# Altium PCB var_2 (1).PcbDoc
Units mil, origin at the board's own origin, x right, y up, seen from the top; angles counter-clockwise.
Board outline 3185.57 x 3152.48 mil, 2 copper layers (Top Layer, Top, Bottom Layer, Bottom); 14 components, 15 nets, 54 pads, 1 vias.
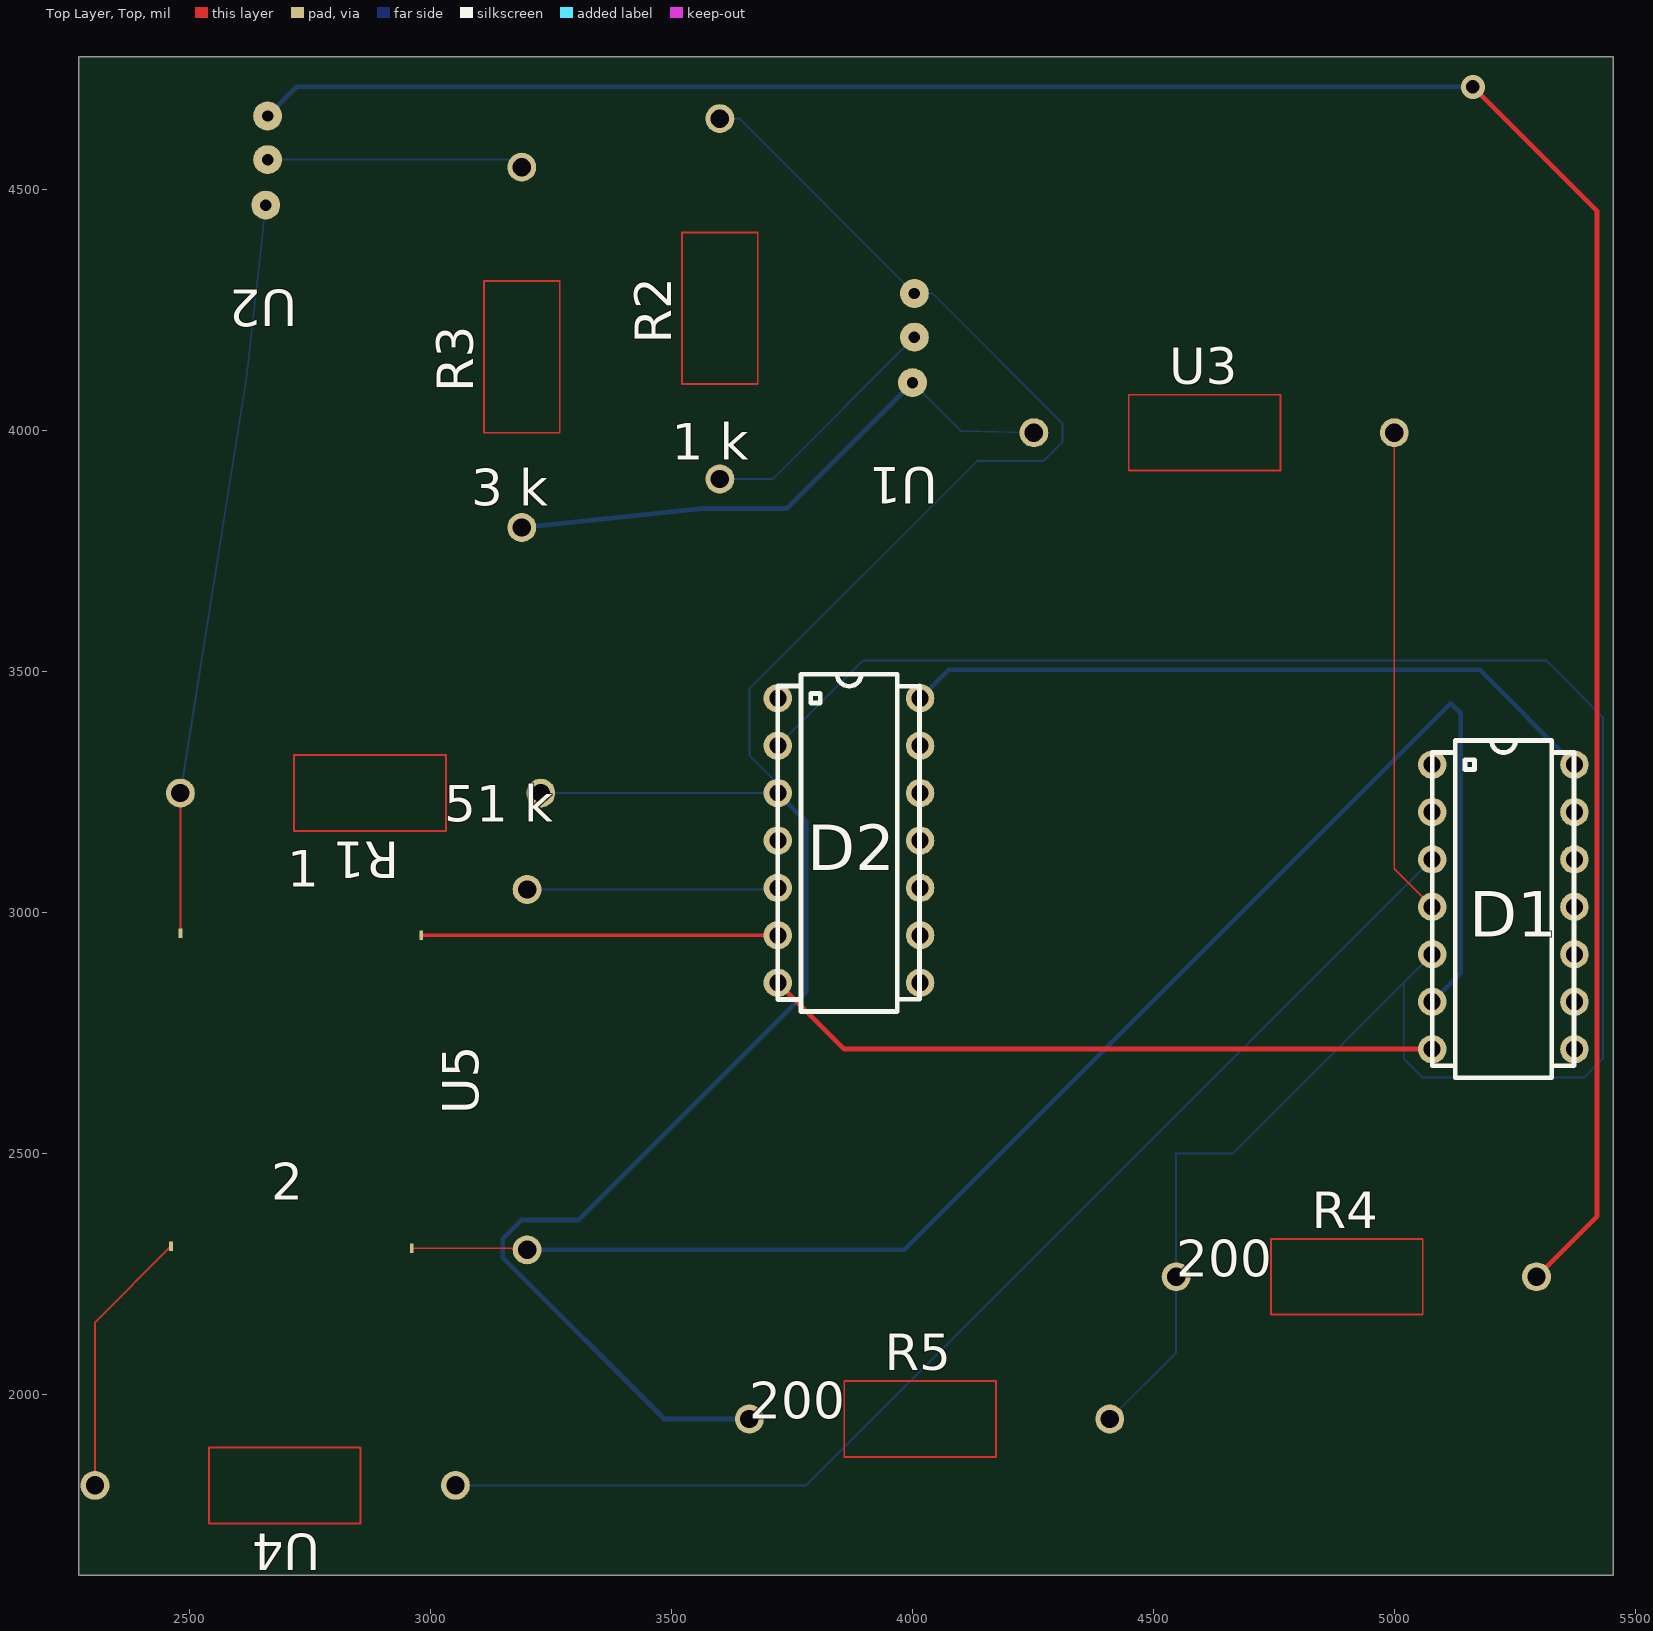
[diagram p0: Top Layer, Top view]
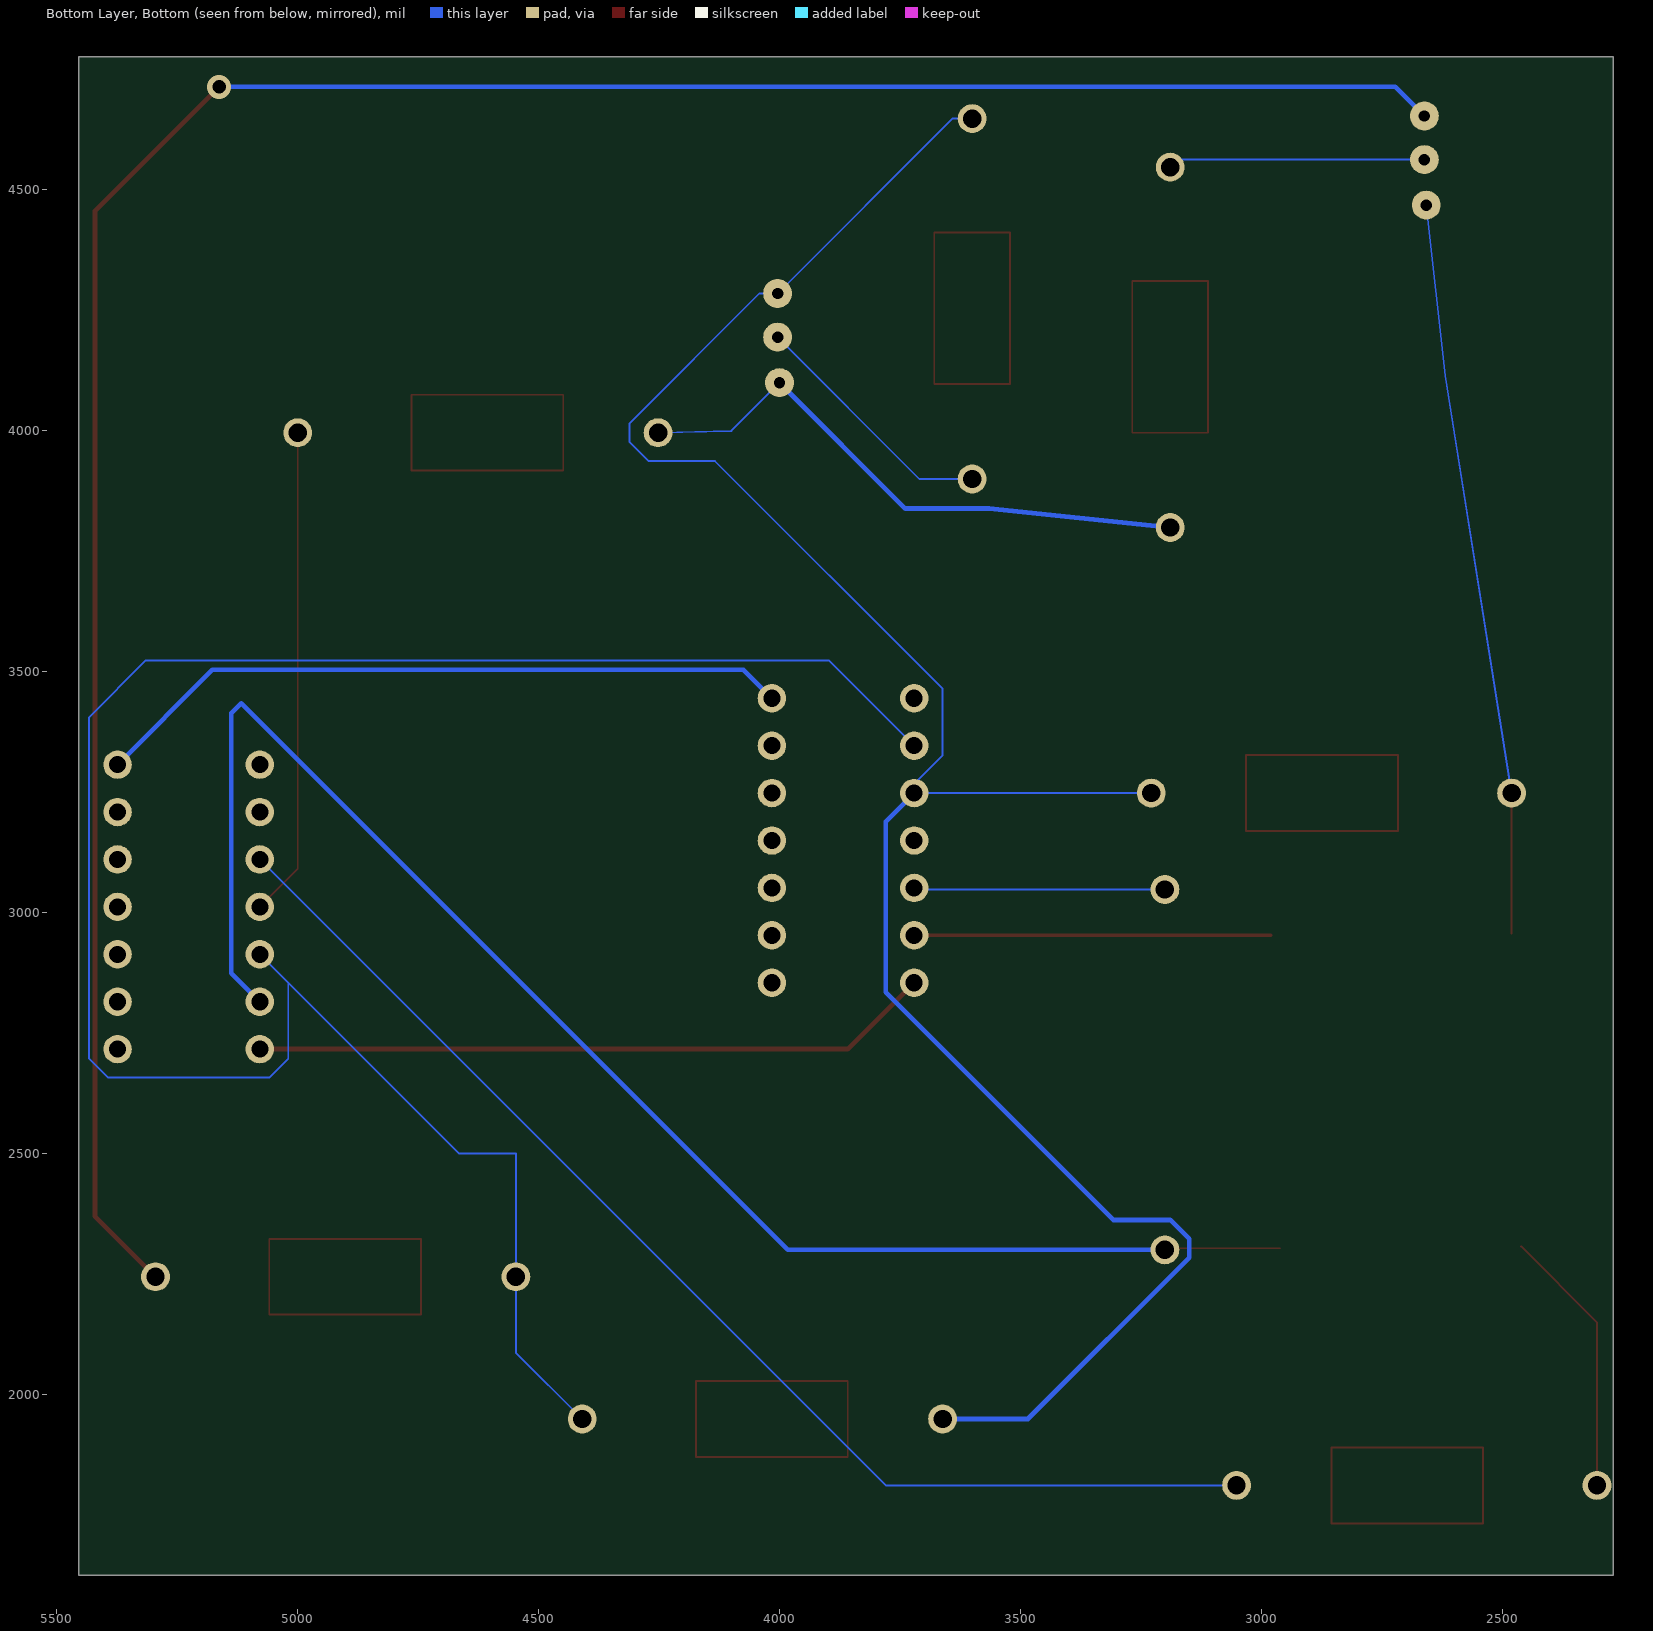
[diagram p1: Bottom Layer, Bottom view, seen from below]

## Layer stack, top to bottom
Top Solder, Top Mask: solder mask 0.4, Solder Resist, Dk 3.5
Top Layer, Top: signal copper 1.4
Dielectric 1: dielectric 12.6, FR-4, Dk 4.8
Bottom Layer, Bottom: signal copper 1.4
Bottom Solder, Bot Mask: solder mask 0.4, Solder Resist, Dk 3.5

## Board outline
2269.15,1624.17 5454.72,1624.17 5454.72,4776.65 2269.15,4776.65

## Design rules (kind name [scope] priority, off if disabled: settings)
Clearance [All] p1: gap=10 ignorepadtopadclearanceinfootprint=FALSE except(0: Arc-Hole Track-Hole SMDPad-Hole THPad-Hole Via-Hole Fill-Hole Poly-Hole Region-Hole Text-Hole; 11.81: Arc-Arc Arc-Track Arc-THPad Arc-Via Track-Track Track-THPad Track-Via THPad-THPad THPad-Via Via-Via)
PlaneClearance [All] p1: clearance=10
PolygonConnect [All] p1: connectstyle=Relief reliefconductorwidth=10 reliefentries=4 polygonreliefangle="90 Angle" airgapwidth=10
RoutingVias [All] p1: holewidth=28 width=50 viastyle="Through Hole" minholewidth=28 minwidth=50 maxholewidth=28 maxwidth=50
SolderMaskExpansion [All] p1: expansion=4 istentingtop=FALSE
Width [All] p1: maxlimit=10 minlimit=10 preferedwidth=10
29 further rules are at their usual default settings.

## Components (designator, comment, footprint, x,y, rotation, side; value= is the part's Value field where it differs from the comment)
1 "{Value}" DIODE_CORPUS 2480.32,2952.76 r0 top
2 "{Value}" DIODE_CORPUS 2460.63,2303.15 r0 top
D1 "" DIP14 5078.74,3307.09 r0 top
D2 "" DIP14 3720.47,3444.88 r0 top
R1 "51 k" RES 3228.35,3248.03 r180 top
R2 "1 k" RES 3600,3900 r90 top
R3 "3 k" RES 3188.98,3799.21 r90 top
R4 "200" RES 4547.24,2244.09 r0 top
R5 "200" RES 3661.42,1948.82 r0 top
U1 "{Value}" "TRANSISTOR CORPUS_TRANSISTOR(Primary)" 4000,4100 r180 top
U2 "{Value}" "TRANSISTOR CORPUS_TRANSISTOR(Primary)" 2657.48,4468.5 r180 top
U3 "{Value}" DIODE#1 4251.97,3996.06 r0 top
U4 "{Value}" DIODE#1 3051.18,1811.02 r180 top
U5 "{Value}" DIODE#2 3200,2300 r90 top

## Footprints (in the part's own frame and the unit in brackets; to place one, negate y for a bottom-side part, rotate by r counter-clockwise, add the part's x,y. Pads: shape width x height; smd on the part's side, far side on the other; paste and mask are expansions set on the pad)
DIODE#1 [mil]
  round 60 hole 38: 1(0,0) 2(748.03,0)
  Top Layer, Top lines w3.94: 196.85,-78.74 511.81,-78.74 511.81,78.74 196.85,78.74 196.85,-78.74
DIODE#2 [mil]
  round 60 hole 38: 1(0,0) 2(748.03,0)
DIODE_CORPUS [mm]
  rect 0.2x0.5 smd: 1(0,0.1) 2(12.7,0)
DIP14 [mm]
  round 1.5 hole 0.9: 1(0,0) 2(0,-2.5) 3(0,-5) 4(0,-7.5) 5(0,-10) 6(0,-12.5) 7(0,-15) 8(7.5,-15) 9(7.5,-12.5) 10(7.5,-10) 11(7.5,-7.5) 12(7.5,-5) 13(7.5,-2.5) 14(7.5,0)
  silkscreen extent 0,-16.51 7.47,1.27
RES [mil]
  round 60 hole 38: 1(0,0) 2(748.03,0)
  Top Layer, Top lines w3.94: 511.81,78.74 196.85,78.74 196.85,-78.74 511.81,-78.74 511.81,78.74
"TRANSISTOR CORPUS_TRANSISTOR(Primary)" [mil]
  round 60 hole 23.62: B(-3.94,-94.49) C(-3.94,-185.04) E(0,0)

## Via types
v1: diameter 50, hole 28, Top Layer, Top to Bottom Layer, Bottom, 1 vias

## Nets (pads, with @x,y where several pads share a name; then routed paths per layer and width w, separated by ;. In a path a pad name is that pad's centre, name@x,y a point inside that pad or via, vN(x,y) a via of type N, cw(c..) or ccw(c..) an arc to the next point about the centre after c; other vN are vias at no path point)
1: D2.3 R1.1 R2.2 R5.1 U1.C | length 4576.6
  Bottom Layer, Bottom w3.94: R1.1 D2.3 3720.47,3267.72 3661.42,3326.77 3661.42,3464.57 4133.86,3937.01 4271.65,3937.01 4311.02,3976.38 4311.02,4015.75 4041.73,4285.04 U1.C 3640.94,4648.03 R2.2
  Bottom Layer, Bottom w10: R5.1 3484.25,1948.82 3149.61,2283.46 3149.61,2322.83 3188.98,2362.2 3307.09,2362.2 3779.53,2834.65 3779.53,3188.98 D2.3
GND: D1.7 D2.7 | length 1415.3
  Top Layer, Top w10: D2.7 3858.27,2716.54 D1.7
NET00000: D1.4 U3.2 | length 1016.9
  Top Layer, Top w3.94: U3.2 5000,3090.55 D1.4
NET00001: 2.1 U4.2 | length 561.3
  Top Layer, Top w3.94: U4.2 2303.15,2149.61 2.1
NET00003: R4.2 U2.C | length 5155.5
  Top Layer, Top w10: v1(5163,4714) 5421,4456 5421,2369.82 R4.2
  Bottom Layer, Bottom w10: U2.C 2721.87,4714 v1(5163,4714)
NET00005: D1.5 D2.2 R4.1 R5.2 | length 4458
  Bottom Layer, Bottom w3.94: D2.2 3897.64,3523.62 5314.96,3523.62 5433.07,3405.51 5433.07,2696.85 5393.7,2657.48 5059.06,2657.48 5019.69,2696.85 5019.69,2854.33 ; R5.2 4547.24,2086.61 R4.1 4547.24,2500 4665.35,2500 5019.69,2854.33 ; D1.5 5019.69,2854.33
NET00006: R2.1 U1.B | length 525.9
  Bottom Layer, Bottom w3.94: R2.1 3709.45,3900 U1.B
NET00007: R3.1 U1.E U3.1 | length 1214.8
  Bottom Layer, Bottom w3.94: U1.E 4100,4000 U3.1
  Bottom Layer, Bottom w10: R3.1 3565.35,3838.58 3738.58,3838.58 U1.E
NET00008: D2.5 U5.2 | length 521.8
  Bottom Layer, Bottom w3.94: U5.2 3717.32,3048.03 D2.5
NET00009: R3.2 U2.B | length 534.1
  Bottom Layer, Bottom w3.94: U2.B 3173.23,4562.99 R3.2
NET00011: 1.2 D2.6 | length 740.2
  Top Layer, Top w7.87: 1.2 D2.6
NET00012: 2.2 D1.6 U5.1 | length 3280.6
  Top Layer, Top w3.94: 2.2 3196.85,2303.15 U5.1
  Bottom Layer, Bottom w10: U5.1 3982.68,2300 5117.32,3434.65 5137.8,3414.17 5137.8,2874.02 D1.6
NET00013: D1.3 U4.1 | length 2565.7
  Bottom Layer, Bottom w3.94: U4.1 3779.53,1811.02 D1.3
VCC: D1.14 D2.14 | length 1464.3
  Bottom Layer, Bottom w10: D2.14 4074.8,3503.94 5177.16,3503.94 D1.14
VCC_+5V: 1.1 R1.2 U2.E | length 1524.9
  Top Layer, Top w3.94: 1.1 R1.2
  Bottom Layer, Bottom w3.94: R1.2 2618.11,4114.17 U2.E
pads on no net: D1.1 D1.2 D1.8 D1.9 D1.10 D1.11 D1.12 D1.13 D2.1 D2.4 D2.8 D2.9 D2.10 D2.11 D2.12 D2.13